# EAGLE board Servo-Steuer-Schaltung (EAGLE 6.2)
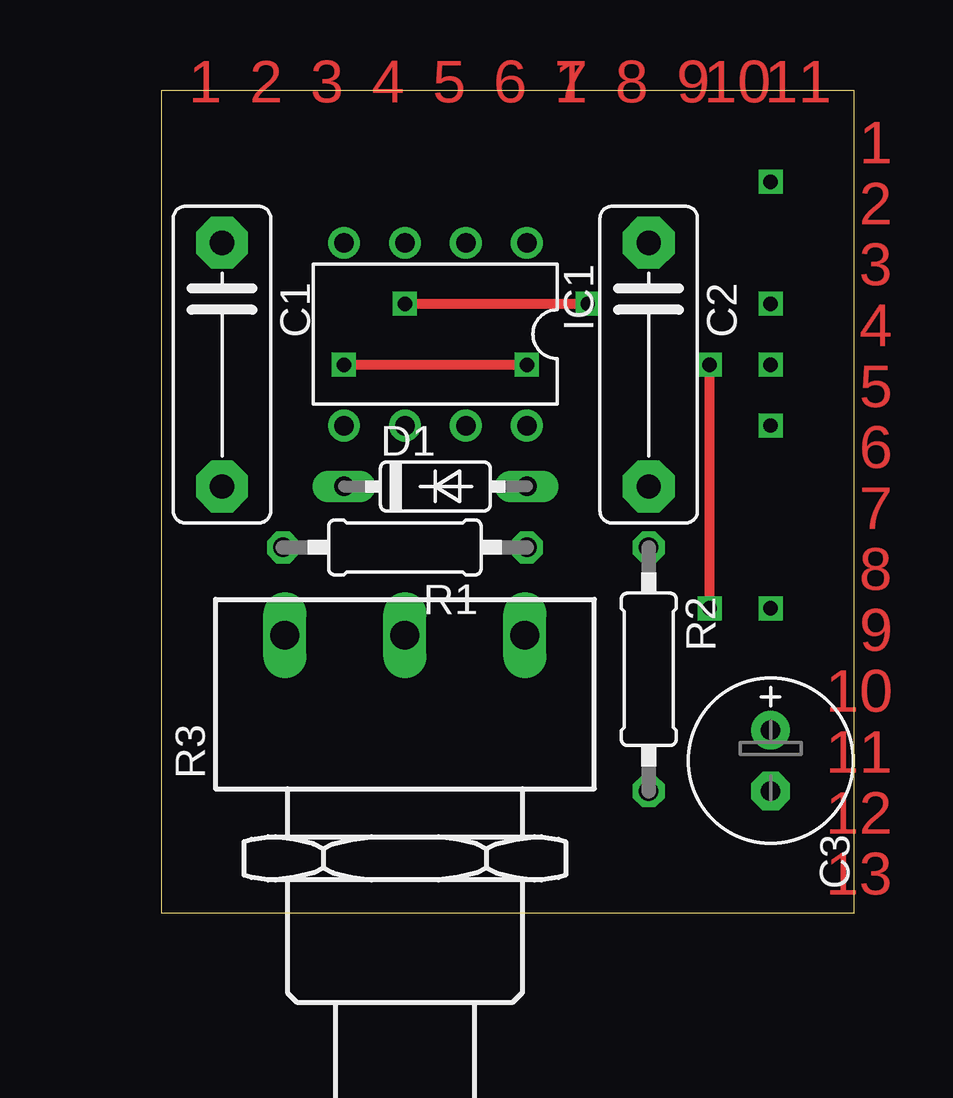
[diagram p0: board, top side]
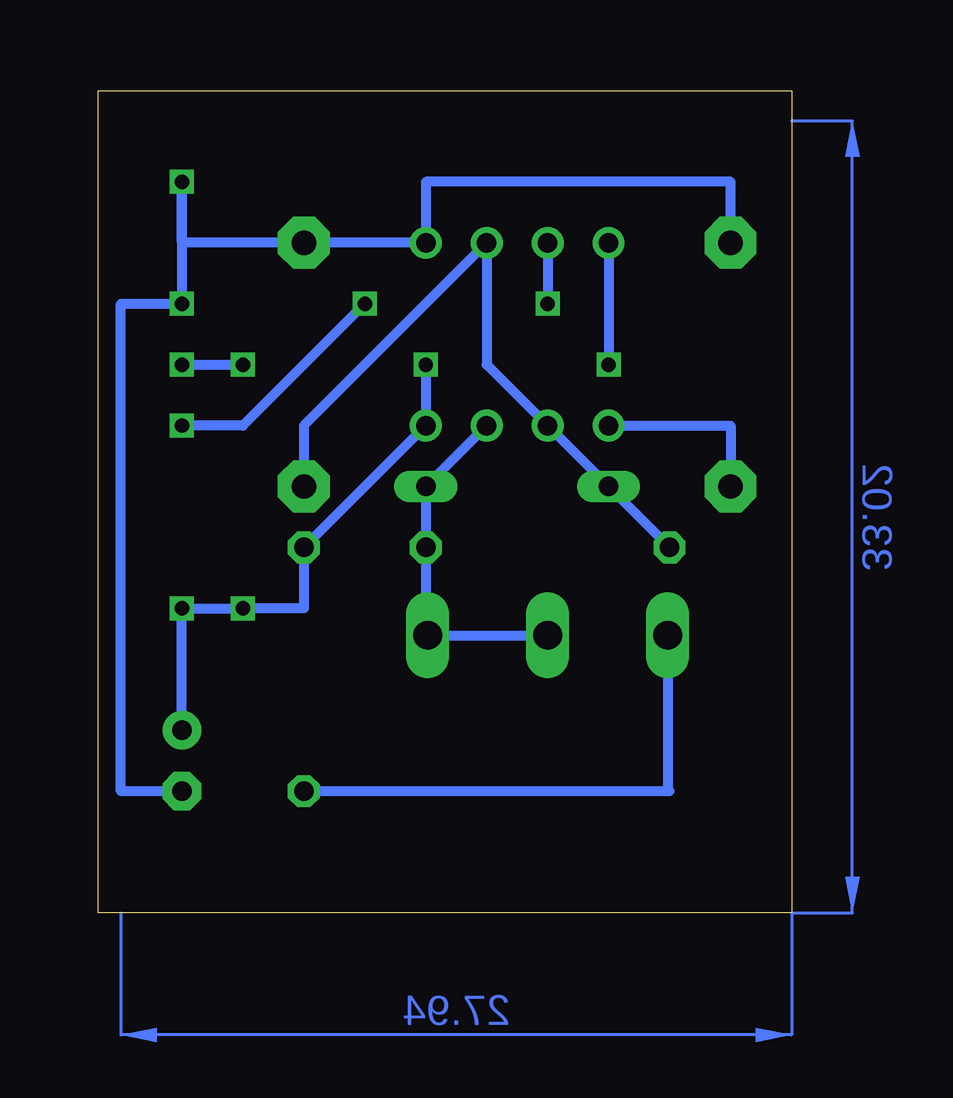
[diagram p1: board, bottom side, seen from below]

Size 28.88 x 34.28 mm. Coordinates in mm from the lower left corner, seen from the top.
Outline: 0,0 28.88,0 28.88,34.28 0,34.28 0,0
Copper layers (1*16): Top 0.035mm / dielectric 1.5mm / Bottom 0.035mm
Design rules: minimum track width 10mil, minimum drill 24mil, track to track 8mil, track to pad 8mil, pad to pad 8mil, via to via 8mil, smd to smd 8mil, copper to edge 40mil, drill to drill 8mil, minimum pad ring 10mil, minimum via ring 8mil, stop-mask expansion 4mil, vias tented up to drill 0mil, thermal gap 10mil

## Footprints (pad centres in the part's own frame; a part is rotated, then mirrored left to right if it is on the bottom)
C10B4 = drill 1.016 pad 2.159 octagon: 1 -5.08,0; 2 5.08,0
E2,5-7 = drill 0.813 pad 1.6: + -1.27,0 | drill 0.813 pad 1.6 octagon: - 1.27,0
DO35-7 = drill 0.813 long: A 3.81,0; C -3.81,0
DIL08 = drill 0.813 pad 1.27: 1 -3.81,-3.81; 2 -1.27,-3.81; 3 1.27,-3.81; 4 3.81,-3.81; 5 3.81,3.81; 6 1.27,3.81; 7 -1.27,3.81; 8 -3.81,3.81
0207/10 = drill 0.813 octagon: 1 -5.08,0; 2 5.08,0
PC16S = drill 1.2 long: 1A -5,6.5; 1E 5,6.5; 1S 0,6.5

## Placement (x,y rotation side)
C1  10n  [C10B4]  2.54,22.86 270 top
C2  33n  [C10B4]  20.32,22.86 270 top
C3  100µF  [E2,5-7]  25.4,6.35 270 top
D1  D1  [DO35-7]  11.43,17.78 0 top
IC1  NE555N  [DIL08]  11.43,24.13 180 top
R1  3M3  [0207/10]  10.16,15.24 180 top
R2  33k  [0207/10]  20.32,10.16 270 top
R3  PC16S  [PC16S]  10.16,5.08 0 top

## Library data of the parts
C1 C2 = capacitor-wima
C3 R1 R2 = rcl
D1 = diode
IC1 = linear
R3 = piher; OC_FARNELL: 4452940; OC_NEWARK: unknown

## Nets
GND: C1.1 C2.1 C3.- IC1.1
N$2: R2.2 R3.1A
N$3: D1.A IC1.7 R1.1 R3.1E R3.1S
N$4: C2.2 D1.C IC1.2 IC1.6 R1.2
N$7: C1.2 IC1.5
SIGNAL: IC1.3
V+: C3.+ IC1.4 IC1.8 R2.1

## Tracks (layer width: path | path; a pad name or v marks a point on that pad's centre or on a via)
GND  (via drill 0.6)
  Bottom 0.406: C1.1 2.54,30.48 15.24,30.48 IC1.1 C2.1 25.4,27.94 v25.4,30.48 v25.4,25.4 27.94,25.4 27.94,5.08 C3.-
N$2
  Bottom 0.406: R3.1A 5.16,5.16 5.08,5.08 R2.2
N$3
  Bottom 0.406: R3.1S R3.1E 15.24,11.66 R1.1 D1.A IC1.7
N$4
  Bottom 0.406: C2.2 20.32,20.32 IC1.2 12.7,22.86 IC1.6 D1.C R1.2
N$7
  Bottom 0.406: IC1.5 2.54,20.32 C1.2
SIGNAL  (via drill 0.6)
  Top 0.406: v10.16,25.4 v17.78,25.4
  Bottom 0.406: IC1.3 v10.16,25.4 | v17.78,25.4 22.86,20.32 v25.4,20.32
V+  (via drill 0.6)
  Top 0.406: v7.62,22.86 v15.24,22.86 | v22.86,12.7 v22.86,22.86
  Bottom 0.406: IC1.4 v7.62,22.86 | v15.24,22.86 IC1.8 R2.1 20.32,12.7 v22.86,12.7 v25.4,12.7 C3.+ | v25.4,22.86 v22.86,22.86
(copper drawn outside any net)
  shapes: Bottom area x2

## Text on the board
Top: 1 | 2 | 3 | 4 | 5 | 6 | 1 | 7 | 8 | 9 | 10 | 11 | 1 | 2 | 3 | 4 | 5 | 6 | 7 | 8 | 9 | 10 | 11 | 12 | 13